# Altium PCB RatumnScanner_PcbDoc@20260329fix1.pcbdoc (part 1 of 2)
Units mil, origin at the board's own origin, x right, y up, seen from the top; angles counter-clockwise.
Board outline 3937.01 x 983.86 mil, 6 copper layers (Top Layer, 内层1, 内层2, CONNECTION, IO_PINS, Bottom Layer), stack 62.125 mil thick; 143 components, 128 nets, 581 pads, 301 vias.
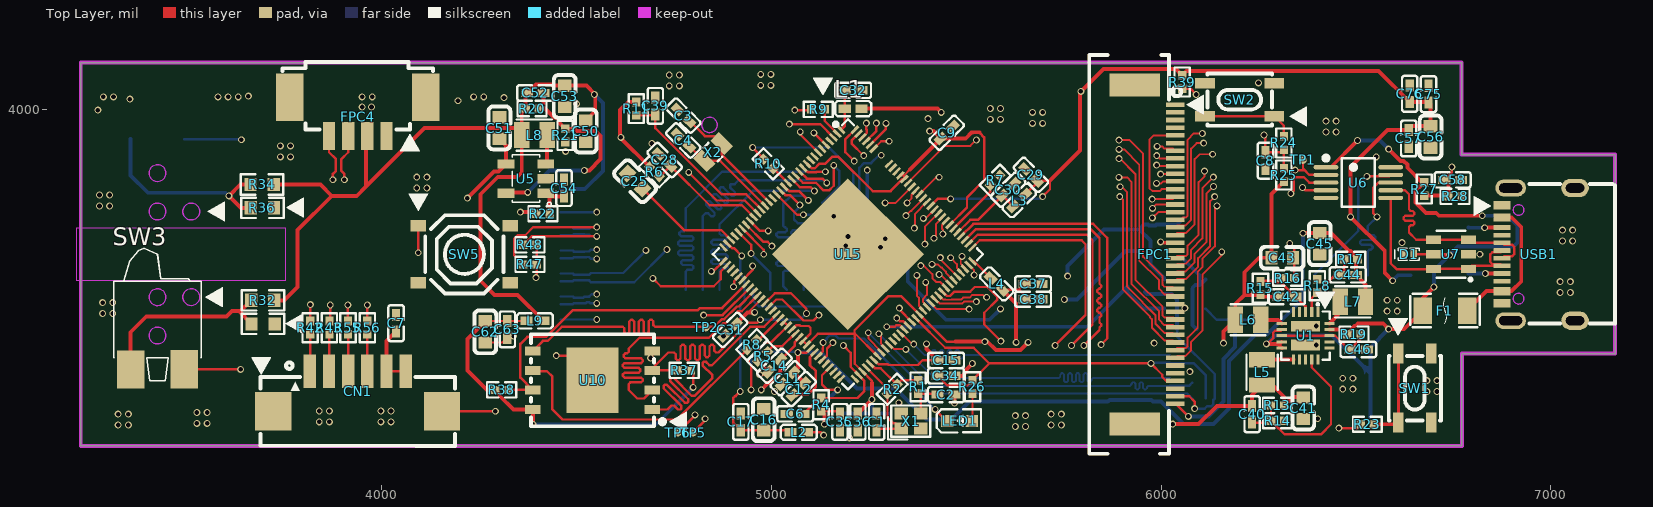
[diagram p0: Top Layer view]
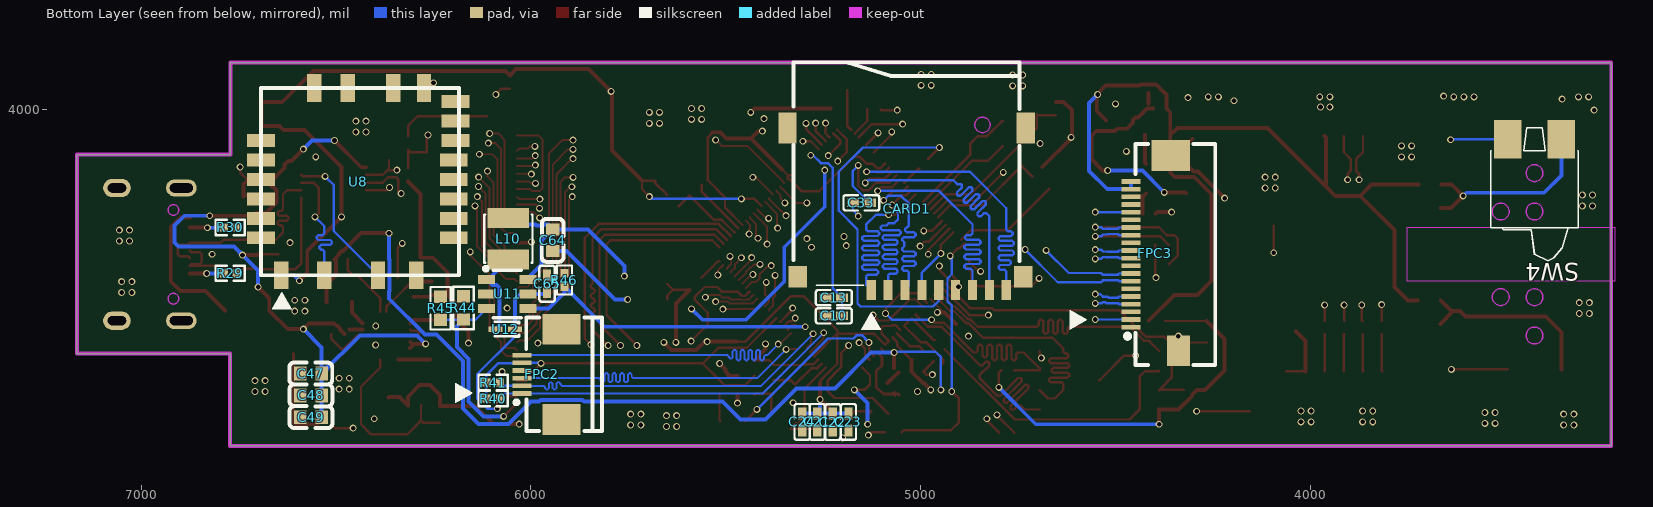
[diagram p1: Bottom Layer view, seen from below]
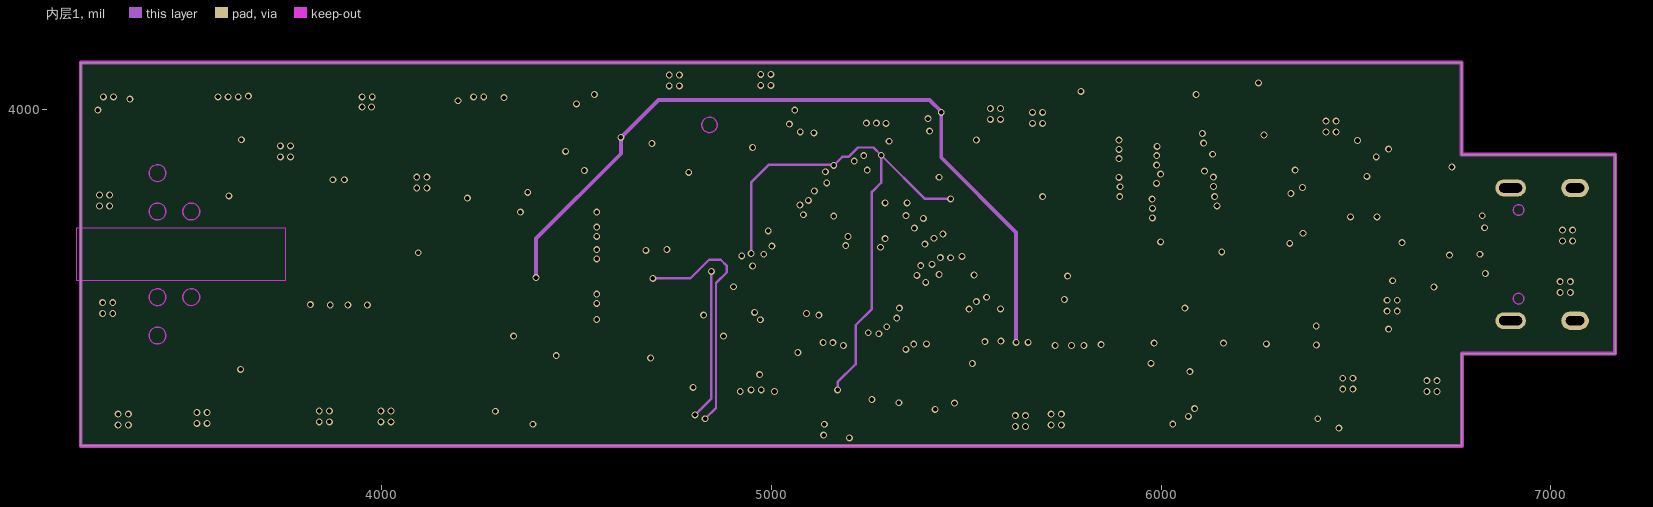
[diagram p2: 内层1]
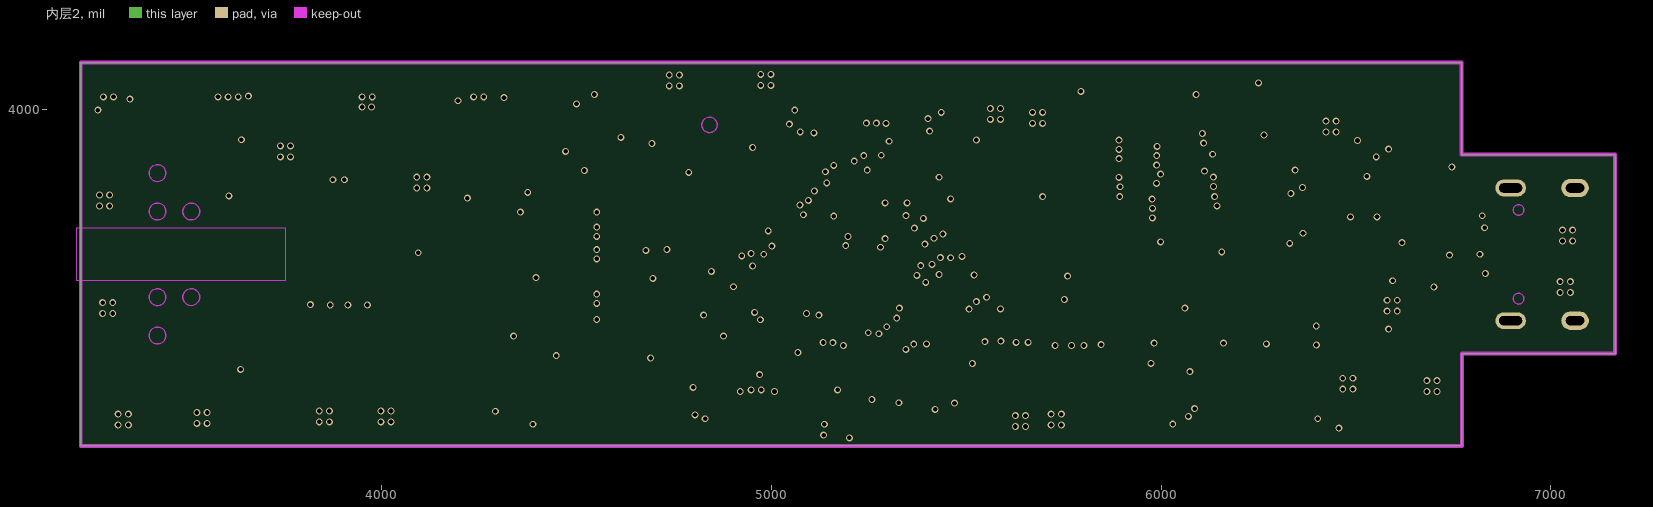
[diagram p3: 内层2]
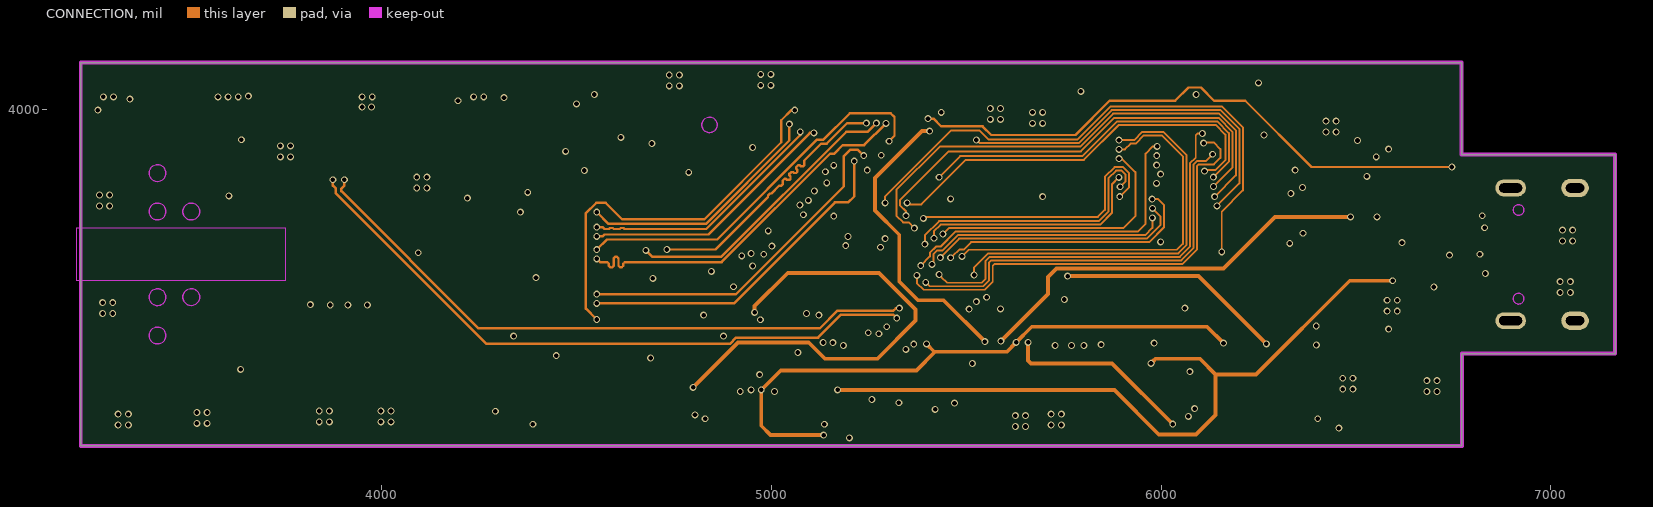
[diagram p4: CONNECTION]
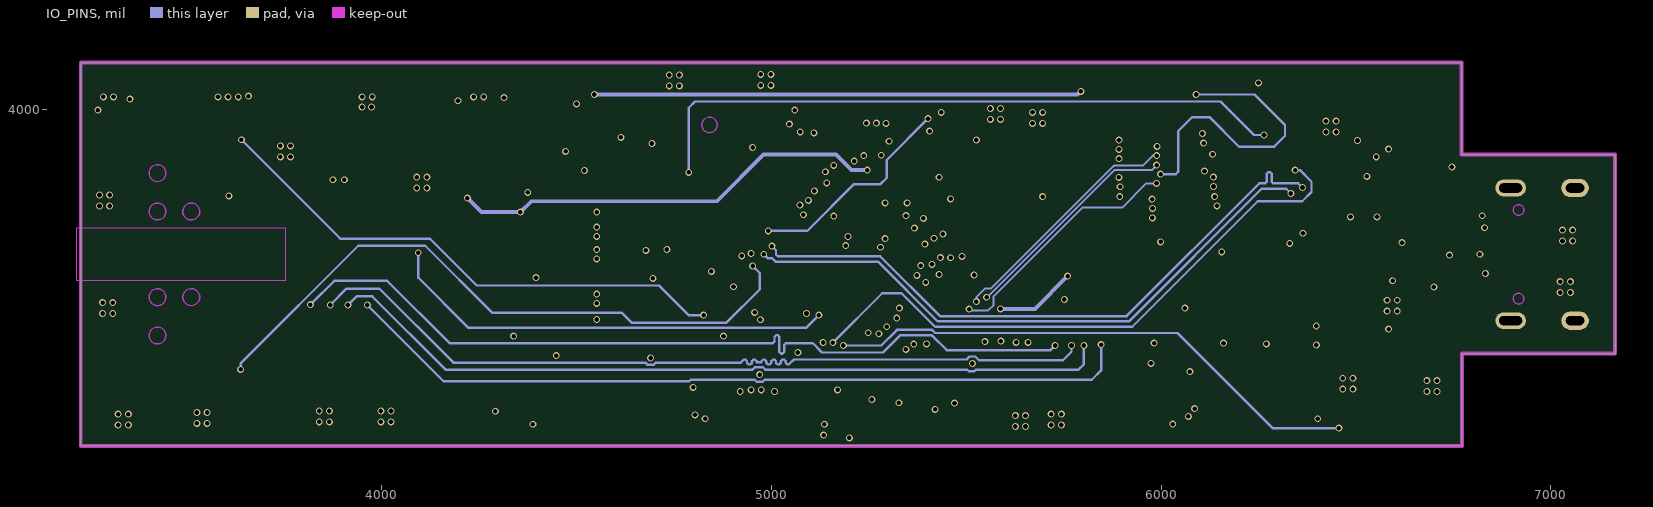
[diagram p5: IO_PINS]

## Layer stack, top to bottom
Top Layer: signal copper 1.378
Dielectric1: surface 3.913, 3313 RC57% 4.2mil, Dk 0
内层1: signal copper 1.378
Dielectric2: surface 21.654, 0.55mm H/H No copper, Dk 0
内层2: signal copper 1.378
Dielectric3: surface 4.283, 2116 RC54% 4.9mil, Dk 0
CONNECTION: signal copper 0.598
Dielectric4: surface 21.654, 0.55mm H/H No copper, Dk 0
IO_PINS: signal copper 0.598
Dielectric5: surface 3.913, 3313 RC57% 4.2mil, Dk 0
Bottom Layer: signal copper 1.378

## Board outline
7165.01,3883.86 7165.01,3373.23 6771.9,3373.23 6771.9,3136.14 3228,3136.14 3228,4120 6771.31,4120 6771.31,3883.86

## Design rules (kind name [scope] priority, off if disabled: settings)
BoardOutlineClearance copperThickness1oz [All] p0: genericclearance=10 ignorepadtopadclearanceinfootprint=FALSE except(0: Arc-SplitContinuation Track-SplitContinuation SMDPad-SplitContinuation THPad-SplitContinuation Via-SplitContinuation Fill-SplitContinuation Poly-SplitContinuation Region-SplitContinuation Text-SplitContinuation)
BoardOutlineClearance copperThickness2oz [All] p0: genericclearance=10 ignorepadtopadclearanceinfootprint=FALSE except(0: Arc-SplitContinuation Track-SplitContinuation SMDPad-SplitContinuation THPad-SplitContinuation Via-SplitContinuation Fill-SplitContinuation Poly-SplitContinuation Region-SplitContinuation Text-SplitContinuation)
BoardOutlineClearance 50R_安全间距 [All] p0: genericclearance=10 ignorepadtopadclearanceinfootprint=FALSE except(0: Arc-SplitContinuation Track-SplitContinuation SMDPad-SplitContinuation THPad-SplitContinuation Via-SplitContinuation Fill-SplitContinuation Poly-SplitContinuation Region-SplitContinuation Text-SplitContinuation)
BoardOutlineClearance Plane_innerPlane [All] p0: genericclearance=10 ignorepadtopadclearanceinfootprint=FALSE except(0: Arc-SplitContinuation Track-SplitContinuation SMDPad-SplitContinuation THPad-SplitContinuation Via-SplitContinuation Fill-SplitContinuation Poly-SplitContinuation Region-SplitContinuation Text-SplitContinuation)
BoardOutlineClearance Copper_copperRegion [All] p0: genericclearance=10 ignorepadtopadclearanceinfootprint=FALSE except(0: Arc-SplitContinuation Track-SplitContinuation SMDPad-SplitContinuation THPad-SplitContinuation Via-SplitContinuation Fill-SplitContinuation Poly-SplitContinuation Region-SplitContinuation Text-SplitContinuation)
BoardOutlineClearance otherClearance [All] p0: genericclearance=10 ignorepadtopadclearanceinfootprint=FALSE except(0: Arc-SplitContinuation Track-SplitContinuation SMDPad-SplitContinuation THPad-SplitContinuation Via-SplitContinuation Fill-SplitContinuation Poly-SplitContinuation Region-SplitContinuation Text-SplitContinuation)
Clearance copperThickness1oz [All] p1: gap=7 ignorepadtopadclearanceinfootprint=FALSE
Clearance copperThickness2oz [All] p1: gap=7 ignorepadtopadclearanceinfootprint=FALSE
Clearance 50R_安全间距 [All] p1: gap=7 ignorepadtopadclearanceinfootprint=FALSE
Clearance Plane_innerPlane [All] p1: gap=7 ignorepadtopadclearanceinfootprint=FALSE
Clearance Copper_copperRegion [All] p1: gap=7 ignorepadtopadclearanceinfootprint=FALSE
Clearance otherClearance [All] p1: gap=7 ignorepadtopadclearanceinfootprint=FALSE
DiffPairsRouting USB [All] p1: maxuncoupledlength=30 minlimit=7.4803 maxlimit=Infinity mostfreqgap=7.7953 toplayer_minwidth=6.1811 toplayer_prefwidth=6.1811 toplayer_maxwidth=6.1811 bottomlayer_minwidth=6.1811 bottomlayer_prefwidth=6.1811 bottomlayer_maxwidth=6.1811 midlayer1_minwidth=6.1811 midlayer1_prefwidth=6.1811 midlayer1_maxwidth=6.1811 midlayer2_minwidth=6.1811 midlayer2_prefwidth=6.1811 midlayer2_maxwidth=6.1811 midlayer3_minwidth=6.1811 midlayer3_prefwidth=6.1811 midlayer3_maxwidth=6.1811 midlayer4_minwidth=6.1811 midlayer4_prefwidth=6.1811 midlayer4_maxwidth=6.1811
DiffPairsRouting GMII/MIPI [All] p1: maxuncoupledlength=10 minlimit=7.9921 maxlimit=Infinity mostfreqgap=7.9921 toplayer_minwidth=4.8819 toplayer_prefwidth=4.8819 toplayer_maxwidth=4.8819 bottomlayer_minwidth=4.8819 bottomlayer_prefwidth=4.8819 bottomlayer_maxwidth=4.8819 midlayer1_minwidth=4.8819 midlayer1_prefwidth=4.8819 midlayer1_maxwidth=4.8819 midlayer2_minwidth=4.8819 midlayer2_prefwidth=4.8819 midlayer2_maxwidth=4.8819 midlayer3_minwidth=4.8819 midlayer3_prefwidth=4.8819 midlayer3_maxwidth=4.8819 midlayer4_minwidth=4.8819 midlayer4_prefwidth=4.8819 midlayer4_maxwidth=4.8819
DiffPairsRouting MIC [All] p1: maxuncoupledlength=27.5984 minlimit=7.9921 maxlimit=Infinity mostfreqgap=7.9921 toplayer_minwidth=4.0157 toplayer_prefwidth=4.0157 toplayer_maxwidth=4.0157 bottomlayer_minwidth=4.0157 bottomlayer_prefwidth=4.0157 bottomlayer_maxwidth=4.0157 midlayer1_minwidth=4.0157 midlayer1_prefwidth=4.0157 midlayer1_maxwidth=4.0157 midlayer2_minwidth=4.0157 midlayer2_prefwidth=4.0157 midlayer2_maxwidth=4.0157 midlayer3_minwidth=4.0157 midlayer3_prefwidth=4.0157 midlayer3_maxwidth=4.0157 midlayer4_minwidth=4.0157 midlayer4_prefwidth=4.0157 midlayer4_maxwidth=4.0157
PasteMaskExpansion pasteMaskExpansion [All] p1: expansion=0
PlaneConnect innerPlane [All] p1: planeconnectstyle=Relief reliefexpansion=20 reliefentries=4 reliefconductorwidth=10 reliefairgap=10
PolygonConnect copperRegion [All] p1: connectstyle=Direct reliefentries=4 reliefconductorwidth=10 polygonreliefangle="90 Angle" airgapwidth=10
RoutingVias viaSize [All] p1: viastyle="Through Hole" holewidth=11.811 minholewidth=11.811 maxholewidth=247.9922 width=11.811 minwidth=11.811 maxwidth=247.9922
SolderMaskExpansion solderMaskExpansion [All] p1: useseparateexpansions=TRUE expansion=2.0079 expansionbottom=2.0079
Width copperThickness1oz [All] p1: maxlimit=100 minlimit=5 preferedwidth=8
Width Sign50R [All] p1: maxlimit=6 minlimit=6 preferedwidth=6

## Components (designator, comment, footprint, x,y, rotation, side; value= is the part's Value field where it differs from the comment)
C1 "" C0402 5270,3198 r270 top
C2 "" C0402 5448,3268 r0 top
C3 "" C0402 4774,3984 r315 top
C4 "" C0402 4774,3920 r315 top
C6 "" C0402 5060.95,3218.4 r0 top
C7 "" C0402 4036.97,3451.18 r270 top
C8 "" C0402 6267.74,3868.2 r90 top
C9 "" C0402 5450,3940 r225 top
C10 "" C0402 5222.81,3470.06 r0 bottom
C11 "" C0402 5041.74,3309.75 r45 top
C12 "" C0402 5069.75,3282.26 r45 top
C13 "" C0402 5222.81,3516.71 r0 bottom
C14 "" C0402 5008,3342 r45 top
C15 "" C0402 5448.21,3356.01 r180 top
C16 "" C0603 4980.26,3203.39 r270 top
C17 "" C0402 4921.62,3197.92 r270 top
C21 "" C0402 5265.25,3198.02 r90 bottom
C22 "" C0402 5225.25,3197.43 r90 bottom
C23 "" C0402 5185.25,3197.73 r90 bottom
C24 "" C0402 5304,3198 r90 bottom
C25 "" C0603 4650,3816 r135 top
C28 "" C0402 4726,3870 r315 top
C29 "" C0402 5666,3832 r315 top
C30 "" C0402 5608,3794 r225 top
C31 "" C0402 4894,3434 r45 top
C32 "" C0402 5209.82,4048.76 r180 top
C33 "" C0402 5152,3760 r180 bottom
C34 "" C0402 5448,3316 r180 top
C35 "" C0402 5176,3198 r90 top
C36 "" C0402 5222,3198 r90 top
C37 "" C0402 5671.5,3551.77 r0 top
C38 "" C0402 5671.5,3512.82 r0 top
C39 "" C0402 4702.21,4008.77 r270 top
C40 "" C0402 6233.47,3217.6 r90 top
C41 "" C0603 6364.93,3233.06 r270 top
C42 "" C0402 6322.93,3519.06 r180 top
C43 "" C0603 6310.93,3619.06 r0 top
C44 "" C0402 6478.93,3575.06 r0 top
C45 "" C0603 6406.93,3655.06 r270 top
C46 "" C0402 6506.25,3383.78 r180 top
C47 "" C0603 6564.47,3322.09 r180 bottom
C48 "" C0603 6564,3266 r180 bottom
C49 "" C0603 6564,3210 r180 bottom
C50 "" C0603 4523.64,3943.83 r270 top
C51 "" C0603 4302,3952 r270 top
C52 "" C0402 4394,4042 r180 top
C53 "" C0603 4469.64,4033.21 r90 top
C54 "" C0402 4468,3798 r90 top
C56 "" C0603 6691.58,3929.25 r90 top
C57 "" C0402 6635.36,3925.24 r90 top
C58 "" C0402 6748.11,3818.82 r180 top
C62 "" C0603 4266.07,3429.29 r90 top
C63 "" C0402 4322.56,3435.27 r90 top
C64 "" C0603 5944,3664 r90 bottom
C65 "" C0402 5958.54,3552.54 r270 bottom
C75 "" C0402 6686.13,4038.89 r270 top
C76 "" C0402 6637.94,4039.79 r270 top
CARD1 "" TF-SMD_TF-01A 5036.18,3744.28 r0 bottom
CN1 "" CONN-SMD_6P-P1.25_HC-1.25-6PWT 3938.59,3276.49 r0 top
D1 "" DFN1006-2L-BI-1 6635.36,3628.07 r0 top
F1 "" F1206 6728.39,3483.5 r180 top
FPC1 "" FPC-SMD_P0.50-40P_LCS-SJ-H2.0 5983.91,3627.87 r90 top
FPC2 "" FPC-SMD_6P-P0.50_XUNPU_FPC-05F-6PH20 5972,3320 r90 bottom
FPC3 "" FPC-SMD_20P-P0.50_XUNPU_FPC-05F-20PH20 4409.1,3627.87 r90 bottom
FPC4 "" CONN-SMD_1.25-4PWB 3938.79,3981.46 r180 top
L1 "" L0402 5209.85,4001.71 r0 top
L2 "" L0402 5070.26,3171.39 r180 top
L3 "" L0402 5636,3766 r225 top
L4 "" L0402 5578,3552 r315 top
L5 "" IND-SMD_L2.0-W1.6 6258.93,3325.06 r270 top
L6 "" IND-SMD_L2.0-W1.6 6222.88,3459.84 r180 top
L7 "" IND-SMD_L2.0-W1.6 6492,3506 r0 top
L8 "" IND-SMD_L2.0-W1.6 4392,3934 r180 top
L9 "" L0402 4393.32,3457.4 r180 top
L10 "" IND-SMD_L3.0-W3.0_FNR30XXS 6058,3668 r90 bottom
LED1 "" LED_0603 5484.96,3200.64 r0 top
R1 "" R0402 5376.81,3287.7 r270 top
R2 "" R0402 5310,3282 r45 top
R4 "" R0402 5127.91,3242.31 r270 top
R5 "" R0402 4978,3366 r45 top
R6 "" R0402 4700,3840 r135 top
R7 "" R0402 5574,3818 r225 top
R8 "" R0402 4950,3396 r225 top
R9 "" R0402 5120,4000 r180 top
R10 "" R0402 4992,3860 r135 top
R11 "" R0402 4653.27,4001.85 r90 top
R13 "" R0402 6298.57,3240.14 r0 top
R14 "" R0402 6299.11,3201.09 r180 top
R15 "" R0402 6254.93,3541.06 r270 top
R16 "" R0402 6324.93,3567.06 r180 top
R17 "" R0402 6486.93,3615.06 r0 top
R18 "" R0402 6400.93,3547.06 r270 top
R19 "" R0402 6494.93,3423.06 r180 top
R20 "" R0402 4386,4002 r180 top
R21 "" R0402 4470.96,3932.96 r90 top
R22 "" R0402 4414,3732 r180 top
R23 "" R0402 6529.37,3191.88 r0 top
R24 "" R0402 6315.11,3913.67 r90 top
R25 "" R0402 6315.11,3831.34 r270 top
R26 "" R0402 5516,3288 r90 top
R27 "" R0402 6675.24,3795.46 r90 top
R28 "" R0402 6754.13,3776.65 r180 top
R29 "" R0402 6771.31,3579.36 r180 bottom
R30 "" R0402 6771.31,3696.77 r180 bottom
R32 "" R0603 3695.14,3509.91 r0 top
R34 "" R0603 3693.13,3807.15 r0 top
R36 "" R0603 3694.22,3747.22 r180 top
R37 "" R0402 4776.32,3330.2 r0 top
R38 "" R0402 4308.18,3280 r180 top
R39 "" R0402 6054,4070 r90 top
R40 "" R0402 6097.01,3257.9 r180 bottom
R41 "" R0402 6097.01,3298.84 r180 bottom
R42 "" R0402 3816.49,3439.87 r270 top
R43 "" R0402 3866,3439.87 r270 top
R44 "" R0603 6173.07,3490.24 r270 bottom
R45 "" R0603 6231.65,3489.4 r270 bottom
R46 "" R0402 5914,3562 r270 bottom
R47 "" R0402 4380.52,3601.97 r0 top
R48 "" R0402 4380.52,3652.17 r0 top
R55 "" R0402 3913.49,3439.87 r270 top
R56 "" R0402 3963.23,3439.87 r270 top
SW1 "" SW-SMD_4P-L4.2-W3.3-P2.15-LS5.1 6651.03,3284.52 r270 top
SW2 "" SW-SMD_4P-L4.2-W3.3-P2.15-LS5.1 6201.76,4024.81 r0 top
SW3 "" SW-SMD_ESE22MH24 3424.85,3332.6 r0 top
SW4 "" SW-SMD_ESE22MH24 3424.85,3923.15 r0 bottom
SW5 "" SW-SMD_4P-L5.1-W5.1-P3.70-LS6.5-TL_H1.5 4212.25,3627.87 r0 top
TP1 "" Test-Point-0.5mm 6364,3870 r0 top
TP2 "" Test-Point-0.5mm 4831.6,3440.27 r0 top
TP5 "" Test-Point-0.5mm 4798.99,3170.38 r270 top
TP6 "" Test-Point-0.5mm 4759.62,3170.38 r270 top
U1 "" QFN-20_L3.0-W3.0-P0.40-BL-EP1.9 6370.73,3419.12 r180 top
U5 "" SOT-23-5_L3.0-W1.7-P0.95-LS2.8-BR 4370,3822 r0 top
U6 "" MSOP-10_L3.0-W3.0-P0.50-LS5.0-BL 6506,3812 r270 top
U7 "" SOT-23-6_L2.9-W1.7-P0.95-LS2.8-BL 6743.79,3628.07 r90 top
U8 "" AIC8800DC 6438.49,3814.4 r270 bottom
U10 "" WSON-8_L8.0-W6.0-P1.27-TL-EP-1 4541.15,3304.8 r180 top
U11 "" SOT-23-6_L2.9-W1.6-P0.95-LS2.8-BR 6060.64,3526.11 r0 bottom
U12 "" SOD-523_L1.2-W0.8-LS1.6-RD 6066,3436 r0 bottom
U15 "" QFN-128_L12.3-W12.3-P0.35-TL-EP7.0-1 5196.5,3627.87 r315 top
USB1 "" USB-C-SMD_TYPE-C-6PIN-2MD-073 6968.67,3627.87 r90 top
X1 "" CRYSTAL-SMD_4P-L2.0-W1.6-BL-A 5358,3200 r0 top
X2 "" CRYSTAL-SMD_2P-L2.0-W1.2 4850,3890 r45 top
? "" R0603 3695.83,3449.37 r180 top

## Footprints (in the part's own frame and the unit in brackets; to place one, negate y for a bottom-side part, rotate by r counter-clockwise, add the part's x,y. Pads: shape width x height; smd on the part's side, far side on the other; paste and mask are expansions set on the pad)
AIC8800DC [mm]
  rect 1.8x0.94 smd: 1(-6.1,4.17) 2(-6.1,2.17) 3(-6.1,-0.81) 4(-6.1,-2.97) 11(6.1,-5.13) 12(6.1,-2.33) 13(6.1,1.17) 14(6.1,3.67)
  rect 0.84x1.8 smd: 5(-2.69,-6.45) 6(-1.42,-6.45) 7(-0.15,-6.45) 8(1.12,-6.45) 9(2.39,-6.45) 10(3.66,-6.45) 15(3.66,6.1) 16(2.39,6.1) 17(1.12,6.1) 18(-0.15,6.1) 19(-1.42,6.1) 20(-2.69,6.223) 21(-3.96,6.223) 22(-5.23,6.223)
  silkscreen extent -6.1,-6.45 6.1,6.45
C0402 [mm]
  rect 0.79x0.54 smd: 1(-0.545,0) 2(0.545,0)
  silkscreen extent -1.17,-0.5 1.17,0.5
C0603 [mm]
  rect 0.8x0.9 smd: 1(-0.7,0) 2(0.7,0)
  silkscreen extent -1.41,-0.71 1.39,0.72
CONN-SMD_1.25-4PWB [mm]
  rect 0.8x1.8 smd: 1(-1.875,1.266) 2(-0.625,1.266) 3(0.625,1.266) 4(1.875,1.266)
  rect 1.8x3.1 smd: 5(-4.425,-1.266) 6(4.425,-1.266)
  silkscreen extent -4.9,-3.55 4.9,0.85
CONN-SMD_6P-P1.25_HC-1.25-6PWT [mm]
  rect 0.8x2.2 smd: 1(-3.125,1.3) 2(-1.875,1.3) 3(-0.625,1.3) 4(0.625,1.3) 5(1.875,1.3) 6(3.125,1.3)
  rect 2.35x2.5 smd: 7(-5.505,-1.3) 8(5.505,-1.3)
  silkscreen extent -6.33,-3.56 6.35,1.88
CRYSTAL-SMD_2P-L2.0-W1.2 [mm]
  rect 0.8x1.3 smd: 1(-0.8,0) 2(0.8,0)
  silkscreen extent -0.22,-0.64 0.22,0.64
CRYSTAL-SMD_4P-L2.0-W1.6-BL-A [mm]
  rect 0.875x0.775 smd: 1(-0.638,-0.488) 2(0.638,-0.488) 3(0.638,0.488) 4(-0.638,0.488)
  silkscreen extent -1.49,-1.2 1.27,1.02
DFN1006-2L-BI-1 [mm]
  rect 0.4x0.6 smd: 1(-0.325,0) 2(0.325,0)
  silkscreen extent -0.9,-0.4 0.68,0.4
F1206 [mm]
  rect 1.19x1.728 smd: 1(-1.445,0) 2(1.445,0)
  silkscreen extent -2.27,-1.09 2.27,1.09
FPC-SMD_6P-P0.50_XUNPU_FPC-05F-6PH20 [mm]
  rect 0.3x1.25 smd: 1(-1.25,1.288) 2(-0.75,1.288) 3(-0.25,1.288) 4(0.25,1.288) 5(0.75,1.288) 6(1.25,1.288)
  rect 2x2.5 smd: 7(2.94,-1.288) 8(-2.94,-1.288)
  silkscreen extent -3.7,-3.91 3.7,1.78
FPC-SMD_20P-P0.50_XUNPU_FPC-05F-20PH20 [mm]
  rect 0.3x1.25 smd: 1(-4.75,1.288) 2(-4.25,1.288) 3(-3.75,1.288) 4(-3.25,1.288) 5(-2.75,1.288) 6(-2.25,1.288) 7(-1.75,1.288) 8(-1.25,1.288) 9(-0.75,1.288) 10(-0.25,1.288) 11(0.25,1.288) 12(0.75,1.288) 13(1.25,1.288) 14(1.75,1.288) 15(2.25,1.288) 16(2.75,1.288) 17(3.25,1.288) 18(3.75,1.288) 19(4.25,1.288) 20(4.75,1.288)
  rect 2x2.5 smd: 21(6.44,-1.287)
  rect 2x1.5 smd: 22(-6.287,-1.797)
  silkscreen extent -7.2,-4.19 7.2,1.67
FPC-SMD_P0.50-40P_LCS-SJ-H2.0 [mm]
  rect 0.3x1.2 smd: 1(9.751,-1.318) 2(9.252,-1.318) 3(8.753,-1.318) 4(8.252,-1.318) 5(7.752,-1.318) 6(7.252,-1.318) 7(6.751,-1.318) 8(6.251,-1.318) 9(5.753,-1.318) 10(5.253,-1.318) 11(4.752,-1.318) 12(4.252,-1.318) 13(3.752,-1.318) 14(3.251,-1.318) 15(2.752,-1.318) 16(2.253,-1.318) 17(1.753,-1.318) 18(1.252,-1.318) 19(0.752,-1.318) 20(0.251,-1.318) 21(-0.249,-1.318) 22(-0.748,-1.318) 23(-1.247,-1.318) 24(-1.748,-1.318) 25(-2.248,-1.318) 26(-2.748,-1.318) 27(-3.249,-1.318) 28(-3.749,-1.318) 29(-4.247,-1.318) 30(-4.747,-1.318) 31(-5.248,-1.318) 32(-5.748,-1.318) 33(-6.248,-1.318) 34(-6.749,-1.318) 35(-7.248,-1.318) 36(-7.747,-1.318) 37(-8.247,-1.318) 38(-8.748,-1.318) 39(-9.248,-1.318) 40(-9.749,-1.318)
  rect 1.5x3.3 smd: 41(11.044,1.318) 42(-11.044,1.318)
  silkscreen extent -13,-1.73 13,4.28
IND-SMD_L2.0-W1.6 [mm]
  rect 1x1.72 smd: 1(0.828,0) 2(-0.828,0)
  silkscreen extent -1.14,-1.02 1.14,1.02
IND-SMD_L3.0-W3.0_FNR30XXS [mm]
  rect 1.3x2.72 smd: 1(1.35,0) 2(-1.35,0)
  silkscreen extent -1.58,-1.58 1.58,1.58
L0402 [mm]
  rect 0.79x0.54 smd: 1(-0.545,0) 2(0.545,0)
  silkscreen extent -1.17,-0.5 1.17,0.5
LED_0603 [mil]
  rect 31.5x31.5 smd: 1(-33.5,-0.4) 2(29.5,-0.2)
  silkscreen extent -61,-30 53,30
MSOP-10_L3.0-W3.0-P0.50-LS5.0-BL [mm]
  oval 0.28x1.62 smd: 1(-1,-2.11) 2(-0.5,-2.11) 3(0,-2.11) 4(0.5,-2.11) 5(1,-2.11) 6(1,2.11) 7(0.5,2.11) 8(0,2.11) 9(-0.5,2.11) 10(-1,2.11)
  silkscreen extent -1.74,-2.26 1.58,1.07
QFN-20_L3.0-W3.0-P0.40-BL-EP1.9 [mm]
  rect 0.2x0.665 smd: 1(-0.8,-1.55) 2(-0.4,-1.55) 3(0,-1.55) 4(0.4,-1.55) 5(0.8,-1.55) 11(0.8,1.55) 12(0.4,1.55) 13(0,1.55) 14(-0.4,1.55) 15(-0.8,1.55)
  rect 0.665x0.2 smd: 6(1.55,-0.8) 7(1.55,-0.4) 8(1.55,0) 9(1.55,0.4) 10(1.55,0.8) 16(-1.55,0.8) 17(-1.55,0.4) 18(-1.55,0) 19(-1.55,-0.4) 20(-1.55,-0.8)
  rect 1.9x0.699 smd: 21(0,0.61) 21(0,-0.61)
  silkscreen extent -1.58,-2.11 1.58,1.58
QFN-128_L12.3-W12.3-P0.35-TL-EP7.0-1 [mm]
  rect 0.665x0.196 smd: 1(-6.057,5.425) 2(-6.057,5.075) 3(-6.057,4.725) 4(-6.057,4.375) 5(-6.057,4.025) 6(-6.057,3.675) 7(-6.057,3.325) 8(-6.057,2.975) 9(-6.057,2.625) 10(-6.057,2.275) 11(-6.057,1.925) 12(-6.057,1.575) 13(-6.057,1.225) 14(-6.057,0.875) 15(-6.057,0.525) 16(-6.057,0.175) 17(-6.057,-0.175) 18(-6.057,-0.525) 19(-6.057,-0.875) 20(-6.057,-1.225) 21(-6.057,-1.575) 22(-6.057,-1.925) 23(-6.057,-2.275) 24(-6.057,-2.625) 25(-6.057,-2.975) 26(-6.057,-3.325) 27(-6.057,-3.675) 28(-6.057,-4.025) 29(-6.057,-4.375) 30(-6.057,-4.725) 31(-6.057,-5.075) 32(-6.057,-5.425) 65(6.058,-5.425) 66(6.058,-5.075) 67(6.058,-4.725) 68(6.058,-4.375) 69(6.058,-4.025) 70(6.058,-3.675) 71(6.058,-3.325) 72(6.058,-2.975) 73(6.058,-2.625) 74(6.058,-2.275) 75(6.058,-1.925) 76(6.058,-1.575) 77(6.058,-1.225) 78(6.058,-0.875) 79(6.058,-0.525) 80(6.058,-0.175) 81(6.058,0.175) 82(6.058,0.525) 83(6.058,0.875) 84(6.058,1.225) 85(6.058,1.575) 86(6.058,1.925) 87(6.058,2.275) 88(6.058,2.625) 89(6.058,2.975) 90(6.058,3.325) 91(6.058,3.675) 92(6.058,4.025) 93(6.058,4.375) 94(6.058,4.725) 95(6.058,5.075) 96(6.058,5.425)
  rect 0.196x0.665 smd: 33(-5.425,-6.057) 34(-5.075,-6.057) 35(-4.725,-6.057) 36(-4.375,-6.057) 37(-4.025,-6.057) 38(-3.675,-6.057) 39(-3.325,-6.057) 40(-2.975,-6.057) 41(-2.625,-6.057) 42(-2.275,-6.057) 43(-1.925,-6.057) 44(-1.575,-6.057) 45(-1.225,-6.057) 46(-0.875,-6.057) 47(-0.525,-6.057) 48(-0.175,-6.057) 49(0.175,-6.057) 50(0.525,-6.057) 51(0.875,-6.057) 52(1.225,-6.057) 53(1.575,-6.057) 54(1.925,-6.057) 55(2.275,-6.057) 56(2.625,-6.057) 57(2.975,-6.057) 58(3.325,-6.057) 59(3.675,-6.057) 60(4.025,-6.057) 61(4.375,-6.057) 62(4.725,-6.057) 63(5.075,-6.057) 64(5.425,-6.057) 97(5.425,6.057) 98(5.075,6.057) 99(4.725,6.057) 100(4.375,6.057) 101(4.025,6.057) 102(3.675,6.057) 103(3.325,6.057) 104(2.975,6.057) 105(2.625,6.057) 106(2.275,6.057) 107(1.925,6.057) 108(1.575,6.057) 109(1.225,6.057) 110(0.875,6.057) 111(0.525,6.057) 112(0.175,6.057) 113(-0.175,6.057) 114(-0.525,6.057) 115(-0.875,6.057) 116(-1.225,6.057) 117(-1.575,6.057) 118(-1.925,6.057) 119(-2.275,6.057) 123(-3.675,6.057) 124(-4.025,6.057) 125(-4.375,6.057) 126(-4.725,6.057) 127(-5.075,6.057) 128(-5.425,6.057)
  rect 7x7 smd: 129(0,0)
  silkscreen extent -6.68,-6.23 6.23,6.23
R0402 [mm]
  rect 0.566x0.54 smd: 1(-0.433,0) 2(0.433,0)
  silkscreen extent -0.94,-0.5 0.94,0.5
R0603 [mil]
  rect 31.75x34.02 smd: 1(-29.66,0) 2(29.66,0)
  silkscreen extent -55,-26 55,26
SOD-523_L1.2-W0.8-LS1.6-RD [mm]
  rect 0.93x0.36 smd: 1(-0.635,0) 2(0.635,0)
  silkscreen extent -0.91,-0.55 0.68,0.55
SOT-23-5_L3.0-W1.7-P0.95-LS2.8-BR [mm]
  rect 1.1x0.6 smd: 1(1.3,-0.95) 2(1.3,0) 3(1.3,0.95) 4(-1.3,0.95) 5(-1.3,-0.95)
  silkscreen extent -0.9,-1.78 1.65,1.55
SOT-23-6_L2.9-W1.6-P0.95-LS2.8-BR [mm]
  rect 1.1x0.6 smd: 1(1.35,-0.95) 2(1.35,0) 3(1.35,0.95) 4(-1.35,0.95) 5(-1.35,0) 6(-1.35,-0.95)
  silkscreen extent -0.9,-1.78 1.52,1.55
SOT-23-6_L2.9-W1.7-P0.95-LS2.8-BL [mm]
  rect 0.532x0.99 smd: 1(-0.95,-1.145) 2(0,-1.145) 3(0.95,-1.145) 4(0.95,1.145) 5(0,1.145) 6(-0.95,1.145)
  silkscreen extent -1.75,-1.37 1.53,0.93
SW-SMD_4P-L4.2-W3.3-P2.15-LS5.1 [mm]
  rect 1.3x0.7 smd: 1(-2.25,1.075) 2(2.25,1.075) 3(-2.25,-1.075) 4(2.25,-1.075)
  silkscreen extent -2.1,-1.7 2.1,1.7
SW-SMD_4P-L5.1-W5.1-P3.70-LS6.5-TL_H1.5 [mm]
  rect 1x0.75 smd: 1(-3,1.85) 2(3,1.85) 3(-3,-1.85) 4(3,-1.85)
  silkscreen extent -2.55,-2.55 2.55,2.55
SW-SMD_ESE22MH24 [mm]
  rect 1.8x2.5 smd: 1(-1.75,-0.005) 2(1.75,0.005)
  Board Outline Layer circle w0.003: c0,2.207 r0.55
  Board Outline Layer circle w0.003: c0,4.707 r0.55
  Board Outline Layer circle w0.003: c2.2,4.712 r0.55
  Board Outline Layer region: 0.55,2.207 0.496,1.968 0.343,1.777 0.122,1.671 -0.122,1.671 -0.343,1.777 -0.496,1.968 -0.55,2.207 -0.55,2.207 -0.496,2.445 -0.343,2.637 -0.122,2.743 0.122,2.743 0.343,2.637 0.496,2.445 0.55,2.207
  Board Outline Layer region: 0.55,2.207 0.496,1.968 0.343,1.777 0.122,1.671 -0.122,1.671 -0.343,1.777 -0.496,1.968 -0.55,2.207 -0.55,2.207 -0.496,2.445 -0.343,2.637 -0.122,2.743 0.122,2.743 0.343,2.637 0.496,2.445 0.55,2.207
  Board Outline Layer region: 0.55,4.707 0.496,4.468 0.343,4.277 0.122,4.171 -0.122,4.171 -0.343,4.277 -0.496,4.468 -0.55,4.707 -0.55,4.707 -0.496,4.946 -0.343,5.137 -0.122,5.243 0.122,5.243 0.343,5.137 0.496,4.946 0.55,4.707
  Board Outline Layer region: 0.55,4.707 0.496,4.468 0.343,4.277 0.122,4.171 -0.122,4.171 -0.343,4.277 -0.496,4.468 -0.55,4.707 -0.55,4.707 -0.496,4.946 -0.343,5.137 -0.122,5.243 0.122,5.243 0.343,5.137 0.496,4.946 0.55,4.707
  Board Outline Layer region: 2.75,4.712 2.695,4.473 2.543,4.282 2.322,4.176 2.077,4.176 1.857,4.282 1.704,4.473 1.65,4.712 1.65,4.712 1.704,4.951 1.857,5.142 2.077,5.248 2.322,5.248 2.543,5.142 2.695,4.951 2.75,4.712
  Board Outline Layer region: 2.75,4.712 2.695,4.473 2.543,4.282 2.322,4.176 2.077,4.176 1.857,4.282 1.704,4.473 1.65,4.712 1.65,4.712 1.704,4.951 1.857,5.142 2.077,5.248 2.322,5.248 2.543,5.142 2.695,4.951 2.75,4.712
  silkscreen extent -2.85,-0.74 2.85,7.91
Test-Point-0.5mm [mm]
  round 0.5 smd: 1(0,0)
TF-SMD_TF-01A [mm]
  rect 0.6x1.3 smd: 1(2.301,5.276) 2(1.201,5.276) 3(0.101,5.276) 4(-0.999,5.276) 5(-2.099,5.276) 6(-3.199,5.276) 7(-4.299,5.276) 8(-5.399,5.276) 9(-6.499,5.276)
  rect 1.2x1.4 smd: 10(-7.599,4.426) 13(7.081,4.426)
  rect 1.2x2 smd: 11(-7.76,-5.276) 12(7.76,-5.276)
  Board Outline Layer circle w0.003: c-4.95,-5.478 r0.5
  Board Outline Layer region: -4.45,-5.478 -4.5,-5.261 -4.638,-5.087 -4.839,-4.991 -5.061,-4.991 -5.262,-5.087 -5.4,-5.261 -5.45,-5.478 -5.45,-5.478 -5.4,-5.695 -5.262,-5.869 -5.061,-5.965 -4.839,-5.965 -4.638,-5.869 -4.5,-5.695 -4.45,-5.478
  Board Outline Layer region: -4.45,-5.478 -4.5,-5.261 -4.638,-5.087 -4.839,-4.991 -5.061,-4.991 -5.262,-5.087 -5.4,-5.261 -5.45,-5.478 -5.45,-5.478 -5.4,-5.695 -5.262,-5.869 -5.061,-5.965 -4.839,-5.965 -4.638,-5.869 -4.5,-5.695 -4.45,-5.478
  silkscreen extent -7.37,-9.56 7.37,4.97
USB-C-SMD_TYPE-C-6PIN-2MD-073 [mm]
  rect 0.55x1.1 smd: 1(-3.2,2.375) 2(-2.4,2.375) 11(2.4,2.375) 12(3.2,2.375)
  rect 0.3x1.1 smd: 3(-1.75,2.375) 4(-1.25,2.375) 5(-0.75,2.375) 6(-0.25,2.375) 7(0.25,2.375) 8(0.75,2.375) 9(1.25,2.375) 10(1.75,2.375)
  oval 1.2x1.8 hole 0.6 slot 1.2 at 90 deg: 13(-4.325,-2.375) 14(4.325,-2.375)
  oval 1.1x2 hole 0.6 slot 1.5 at 90 deg: 13(-4.325,1.825) 14(4.325,1.825)
  Board Outline Layer circle w0.003: c-2.89,1.305 r0.35
  Board Outline Layer circle w0.003: c2.89,1.305 r0.35
  Board Outline Layer region: -2.89,0.955 -3.042,0.99 -3.164,1.087 -3.231,1.227 -3.231,1.383 -3.164,1.523 -3.042,1.62 -2.89,1.655 -2.89,1.655 -2.738,1.62 -2.616,1.523 -2.549,1.383 -2.549,1.227 -2.616,1.087 -2.738,0.99 -2.89,0.955
  Board Outline Layer region: -2.89,0.955 -3.042,0.99 -3.164,1.087 -3.231,1.227 -3.231,1.383 -3.164,1.523 -3.042,1.62 -2.89,1.655 -2.89,1.655 -2.738,1.62 -2.616,1.523 -2.549,1.383 -2.549,1.227 -2.616,1.087 -2.738,0.99 -2.89,0.955
  Board Outline Layer region: 2.89,0.955 2.738,0.99 2.616,1.087 2.549,1.227 2.549,1.383 2.616,1.523 2.738,1.62 2.89,1.655 2.89,1.655 3.042,1.62 3.164,1.523 3.231,1.383 3.231,1.227 3.164,1.087 3.042,0.99 2.89,0.955
  Board Outline Layer region: 2.89,0.955 2.738,0.99 2.616,1.087 2.549,1.227 2.549,1.383 2.616,1.523 2.738,1.62 2.89,1.655 2.89,1.655 3.042,1.62 3.164,1.523 3.231,1.383 3.231,1.227 3.164,1.087 3.042,0.99 2.89,0.955
  silkscreen extent -4.5,-4.97 4.57,0.6
WSON-8_L8.0-W6.0-P1.27-TL-EP-1 [mm]
  rect 1x0.6 smd: 1(-3.9,1.905) 2(-3.9,0.635) 3(-3.9,-0.635) 4(-3.9,-1.905) 5(3.9,-1.905) 6(3.9,-0.635) 7(3.9,0.635) 8(3.9,1.905)
  rect 3.4x4.3 smd: 9(0,0)
  silkscreen extent -4.7,-3 4,3

## Via types
v1: diameter 17.72, hole 11.81, Top Layer to Bottom Layer, 301 vias

## Nets (pads, with @x,y where several pads share a name; then routed paths per layer and width w, separated by ;. In a path a pad name is that pad's centre, name@x,y a point inside that pad or via, vN(x,y) a via of type N, cw(c..) or ccw(c..) an arc to the next point about the centre after c; other vN are vias at no path point)
$1N2117: C2.1 R1.2 X1.3 | length 104.9
  Top Layer w6.2: X1.3@5383.12,3219.21 5383.12,3264.35 R1.2@5376.81,3270.66 5423.88,3270.66 C2.1@5426.54,3268
$1N2122: R1.1 R2.2 U15.69 | length 150.2
  Top Layer w6.2: U15.69@5253.09,3347.19 5254.27,3347.19 5265.6,3335.87 5270.63,3335.87 5271.1,3335.39 5280.71,3335.39 R2.2@5322.05,3294.05 5332.74,3304.74 R1.1@5376.81,3304.74
$1N2138: C1.2 R2.1 U15.68 X1.1 | length 262.4
  Top Layer w6.2: U15.68@5243.35,3337.45 5297.95,3282.84 R2.1@5297.95,3269.95 5297.95,3208.81 5311.89,3194.87 5318.8,3194.87 X1.1@5332.88,3180.79 5274.25,3180.79 C1.2@5270,3176.54
$1N2391: C3.2 U15.20 X2.2 | length 306.7
  Top Layer w6.2: C3.2@4789.17,3968.83 4791.74,3968.83 4829.38,3931.18 4853.21,3931.18 ; 4853.28,3931.25 X2.2@4872.27,3912.27 4872.27,3883.9 U15.20@4993.77,3762.4
$1N2395: C4.2 U15.21 X2.1 | length 257.9
  Top Layer w6.2: C4.2@4789.17,3904.83 4790.63,3904.83 X2.1@4827.73,3867.73 4868.95,3867.73 U15.21@4984.03,3752.65
$1N4026: R5.2 U15.52 | length 91.4
  Top Layer w6.2: R5.2@4990.05,3378.05 5004.31,3392.31 5027.97,3392.31 5060.8,3425.14 U15.52@5061.98,3425.14
$1N4187: C25.1 U15.30 | length 281.3
  Top Layer w6.2: C25.1@4669.49,3796.51 4776,3690 4871.31,3690 U15.30@4896.34,3664.97
$1N4454: C28.2 R6.1 U15.24 | length 308.3
  Top Layer w6.2: R6.1@4712.05,3827.95 4714.3,3827.95 C28.2@4741.17,3854.83 4842,3754 4924.22,3754 U15.24@4954.8,3723.42
$1N4706: C30.2 L3.2 U15.101 | length 194.3
  Top Layer w6.2: U15.101@5477.19,3684.45 5478.37,3684.45 5510.13,3716.22 5530.22,3716.22 C30.2@5592.83,3778.83 L3.2@5620.83,3750.83
$1N4863: R7.2 U15.102 | length 150.9
  Top Layer w6.2: U15.102@5467.44,3694.2 5561.95,3788.71 R7.2@5561.95,3805.95
$1N6032: R8.1 U15.48 | length 84.2
  Top Layer w6.2: R8.1@4962.05,3408.05 4966.94,3408.05 U15.48@5023,3464.11
$1N7258: C32.2 L1.1 U15.1 | length 105.1
  Top Layer w7: U15.1@5178.94,3947.57 5188.36,3956.98 L1.1@5188.39,4001.71 C32.2@5188.36,4048.76
$1N7639: R10.1 U15.15 | length 53.7
  Top Layer w6.18: R10.1@5004.05,3847.95 5005.66,3847.95 U15.15@5042.49,3811.12
$1N8202: L4.1 U15.96 | length 64.5
  Top Layer w6.2: U15.96@5516.16,3610.26 5519.74,3610.26 L4.1@5562.83,3567.17
$1N11415: TP5.1 U15.34 | length 913.3
  Top Layer w6.2: v1(4696,3566) 4716,3546 4852,3546 4870,3564 4870,3583.92 U15.34@4886.6,3600.52 ; TP5.1@4798.99,3170.38 4830,3201.39 v1(4830,3206)
  内层1 w6.2: v1(4696,3566) 4792,3566 4840,3614 4870,3614 4886,3598 4886,3582 4858,3554 4858,3234 v1(4830,3206)
$1N11416: TP6.1 U15.33 | length 491.1
  Top Layer w6.2: TP6.1@4759.62,3170.38 4804,3214.76 v1(4804,3216) ; v1(4846,3584) 4850.59,3584 U15.33@4876.85,3610.26
  内层1 w6.2: v1(4804,3216) 4846,3258 v1(4846,3584)
$2N1488: C40.1 R13.1 R14.2 U1.14 | length 456.1
  Top Layer w6.18: C40.1@6233.47,3196.14 6277.12,3196.14 R14.2@6282.07,3201.09 6282.07,3239.61 R13.1@6281.53,3240.14
  Top Layer w6.2: R14.2@6282.07,3201.09 6295.93,3187.23 6295.93,3186.7 6301.25,3181.38 6301.78,3181.38 6317.16,3166 6410,3166 6436,3192 6436,3288 6386.48,3337.52 U1.14@6386.48,3358.09
$2N1577: L5.2 U1.11 | length 80.5
  Top Layer w10: L5.2@6258.93,3357.66 6338.8,3357.66 U1.11@6339.23,3358.09
$2N2468: C42.1 R15.1 R16.2 U1.3 | length 170.5
  Top Layer w6.18: R16.2@6307.89,3567.06 6307.89,3555.56 C42.1@6344.39,3519.06 6361.14,3502.31 6362.68,3502.31 6370.73,3494.25 U1.3@6370.73,3480.14
  Top Layer w10: R15.1@6254.93,3558.1 6298.93,3558.1 R16.2@6307.89,3567.06
$2N2471: L6.2 U1.6 | length 58
  Top Layer w10: L6.2@6255.48,3459.84 6300.47,3459.84 U1.6@6309.7,3450.61
$2N2629: C44.1 R17.1 R18.2 U1.2 | length 176.5
  Top Layer w6.18: U1.2@6386.48,3480.14 6386.48,3515.58 R18.2@6400.93,3530.02 6414.8,3543.89 6415.32,3543.89 6420.63,3549.21 6420.63,3549.73 6445.97,3575.06 C44.1@6457.47,3575.06 6469.89,3587.48 R17.1@6469.89,3615.06
$2N2632: L7.2 U1.20 | length 66.8
  Top Layer w10: U1.20@6431.75,3450.61 6459.4,3478.26 L7.2@6459.4,3506
$2N3621: C46.2 R19.1 U1.8 U1.18 | length 240.3
  Top Layer w6.18: U1.18@6431.75,3419.11 6446.89,3419.11 6482.22,3383.78 C46.2@6484.79,3383.78 6511.97,3410.96 R19.1@6511.97,3423.06
  Top Layer w6.2: U1.8@6309.7,3419.11 U1.18@6431.75,3419.11
$2N4217: C52.1 R20.1 R21.2 U5.5 | length 558.9
  Top Layer w10: U5.5@4318.81,3784.6 4321.22,3787 v1(4375,3787) ; R20.1@4403.04,4002 4418.96,4002 4442.12,3978.84 4448.83,3978.84 4455.27,3972.41 4455.27,3965.69 R21.2@4470.96,3950 4496.03,3950 4501.37,3944.66 4549.34,3944.66 4562,3932 4562,3872 4533,3843 v1(4520,3843) ; 4415.46,4014.42 C52.1@4415.46,4042
  Bottom Layer w10: v1(4375,3787) 4431,3843 v1(4520,3843)
$2N4283: L8.2 U5.3 | length 76
  Top Layer w10: U5.3@4421.19,3859.4 4424.6,3862.82 L8.2@4424.6,3934
$2N4539: C54.1 R22.1 U5.1 | length 95.4
  Top Layer w10: U5.1@4421.19,3784.6 U5.1@4429.24,3776.54 ; R22.1@4431.04,3732 4431.04,3774.74 U5.1@4429.24,3776.54 ; C54.1@4468,3776.54 U5.1@4429.24,3776.54
$5N3312: R30.1 USB1.10 | length 87.5
  Top Layer w10: v1(6830,3696) 6830.78,3696.78 USB1.10@6875.16,3696.78
  Bottom Layer w10: R30.1@6788.35,3696.77 6789.12,3696 v1(6830,3696)
$5N3316: R29.1 USB1.4 | length 87.1
  Top Layer w10: v1(6832,3578.67) USB1.4@6875.16,3578.67
  Bottom Layer w10: R29.1@6788.35,3579.36 6789.04,3578.67 v1(6832,3578.67)
$6N764: C7.2 CN1.5 CN1.6 | length 161.4
  Top Layer w6.2: CN1.5@4012.4,3327.67 CN1.6@4061.62,3327.67
  Top Layer w10: CN1.5@4012.4,3327.67 4012.4,3405.15 C7.2@4036.97,3429.72
$6N778: R24.2 SW2.3 SW2.4 | length 239.2
  Top Layer w6.18: SW2.3@6113.18,3982.49 SW2.4@6290.34,3982.49 6315.11,3957.72 R24.2@6315.11,3930.71
$6N781: R23.2 SW1.3 SW1.4 | length 241.1
  Top Layer w8: R23.2@6546.41,3191.88 6604.64,3191.88 SW1.4@6608.7,3195.94 SW1.3@6608.7,3373.11
$6N783: LED1.2 R26.1 | length 71.2
  Top Layer w6.2: LED1.2@5514.46,3200.44 5516,3201.98 R26.1@5516,3270.96
$6N797: ?.2 R32.1 SW3.1 | length 485.2
  Top Layer w10: SW3.1@3355.95,3332.4 3355.95,3427.95 3396,3468 3602,3468 3616,3482 3633.54,3482 ; R32.1@3665.48,3509.91 3637.57,3482 3633.54,3482 ; ?.2@3666.17,3449.37 3633.54,3482
$6N798: R34.1 R36.2 SW4.1 | length 503.8
  Top Layer w10: R34.1@3663.47,3807.15 3637.15,3807.15 v1(3608,3778) 3638.78,3747.22 R36.2@3664.56,3747.22
  Bottom Layer w10: SW4.1@3355.95,3923.35 3355.95,3830.05 3400,3786 3600,3786 v1(3608,3778)
$8N1098: FPC1.10 R39.1 | length 852
  Top Layer w5: v1(5998.65,3833.67) 6012.96,3833.67 6013.97,3834.67 FPC1.10@6035.79,3834.67
  Top Layer w6.2: R39.1@6054,4052.96 6075.04,4052.96 v1(6090,4038)
  IO_PINS w6.2: v1(5998.65,3833.67) 6037.67,3833.67 6044,3840 6044,3944 6080,3980 6124,3980 6200,3904 6290,3904 6318,3932 6318,3960 6240,4038 v1(6090,4038)
$8N1891: L10.2 U11.1 U12.2 | length 235
  Bottom Layer w10: L10.2@6058,3614.85 6099.18,3573.67 6099.18,3548.91 ; U12.2@6091,3436 6081,3446 6081,3538.91 6081.15,3539.06 6081.15,3542.47 6087.58,3548.91 6099.18,3548.91 ; U11.1@6113.79,3563.51 6099.18,3548.91
ADC: C39.2 R11.1 U15.22 | length 444.1
  Top Layer w6.2: R11.1@4653.27,3984.81 4699.71,3984.81 C39.2@4702.21,3987.31 4702.21,3951.79 4872,3782 4935.19,3782 U15.22@4974.28,3742.91
CODEC_LINEOUT: U15.29
ETH_LED0: U15.117
ETH_LED1: U15.118
ETH_RXN: R42.1 U15.97 | length 2767.5
  Top Layer w6.2: R42.1@3816.49,3456.91 3816.49,3497.92 v1(3817.29,3498.71) ; U15.97@5516.16,3645.48 5534.68,3664 5796,3664 5806.11,3653.89 5806.11,3472.11 v1(5728,3394)
  IO_PINS w6.2: v1(3817.29,3498.71) 3878.58,3560 4014,3560 4174,3400 5003.67,3400 5008.05,3404.38 5008.05,3416.45 5012.44,3420.83 5016.07,3420.83 5020.45,3416.45 5020.45,3377.48 5024.84,3373.1 5028.47,3373.1 5032.85,3377.48 5032.85,3395.62 5037.24,3400 5106,3400 5130,3376 5286,3376 5330,3420 5412,3420 5450,3382 5716,3382 v1(5728,3394)
ETH_RXP: R43.1 U15.98 | length 2773.9
  Top Layer w6.2: R43.1@3866,3456.91 3868,3458.92 v1(3868,3498) ; U15.98@5506.42,3655.22 5529.2,3678 5810,3678 5824.06,3663.94 5824.06,3448.06 v1(5770,3394)
  IO_PINS w6.2: v1(3868,3498) 3910,3540 3994,3540 4184,3350 4676.63,3350 4682.57,3344.06 4697.43,3344.06 4703.37,3350 4921.54,3350 4929.54,3358 4933.17,3358 4937.56,3353.62 4937.56,3349.48 4941.94,3345.1 4945.57,3345.1 4949.96,3349.48 4949.96,3353.62 4954.34,3358 4957.97,3358 4962.36,3353.62 4962.36,3351.22 4974.76,3351.22 4974.76,3353.62 4979.14,3358 4982.77,3358 4987.16,3353.62 4987.16,3349.48 4991.54,3345.1 4995.17,3345.1 4999.56,3349.48 4999.56,3353.62 5003.94,3358 5007.57,3358 5011.96,3353.62 5011.96,3349.48 5016.34,3345.1 5019.97,3345.1 5024.36,3349.48 5024.36,3353.62 5028.74,3358 5032.37,3358 5036.76,3353.62 5036.76,3349.48 5041.14,3345.1 5044.77,3345.1 5057.67,3358 5500.63,3358 5508.32,3365.69 5523.18,3365.69 5532.87,3356 5748,3356 5770,3378 v1(5770,3394)
ETH_TXN: R55.1 U15.99 | length 2776.3
  Top Layer w6.2: R55.1@3913.49,3456.91 v1(3913.49,3498) ; U15.99@5496.67,3664.97 5523.71,3692 5820,3692 5842,3670 5842,3552.4 5846.5,3547.9 5846.5,3544.27 5842.12,3539.88 5840.47,3539.88 5836.09,3535.5 5836.09,3531.87 5840.47,3527.48 5842.12,3527.48 5846.5,3523.1 5846.5,3519.47 5842.12,3515.08 5840.47,3515.08 5836.09,3510.7 5836.09,3507.07 5840.47,3502.68 5842.12,3502.68 5846.5,3498.3 5846.5,3494.67 5842.12,3490.28 5840.47,3490.28 5836.09,3485.9 5836.09,3482.27 5840.47,3477.88 5842.12,3477.88 5846.5,3473.5 5846.5,3469.87 5842,3465.36 5842,3453.08 5846.5,3448.58 5846.5,3444.95 5842,3440.44 5842,3434 v1(5802,3394)
  IO_PINS w6.2: v1(3913.49,3498) 3935.49,3520 3976,3520 4164,3332 4951.57,3332 4957.77,3338.2 4978.23,3338.2 4984.43,3332 5502.13,3332 5506.32,3327.81 5521.18,3327.81 5525.37,3332 5788,3332 5802,3346 v1(5802,3394)
ETH_TXP: R56.1 U15.100 | length 2770.3
  Top Layer w6.2: R56.1@3963.23,3456.91 v1(3963.23,3498) ; U15.100@5486.93,3674.71 5518.22,3706 5826,3706 5862,3670 5862,3412 v1(5846,3396)
  IO_PINS w6.2: v1(3963.23,3498) 4159.23,3302 4789.25,3302 4793.25,3306 4957.68,3306 4962.57,3301.12 4977.43,3301.12 4982.32,3306 5822,3306 5846,3330 v1(5846,3396)
FSPI_CLK: R8.2 U10.6 | length 726.2
  Top Layer w6.2: U10.6@4387.61,3329.8 4389.41,3328 4424,3328 4438,3314 4438,3230 4464,3204 4758,3204 R8.2@4937.95,3383.95
FSPI_CS0N: U10.1 U15.47 | length 766.7
  Top Layer w6.2: U10.1@4694.69,3229.8 4733.8,3229.8 4743.94,3239.94 4750.14,3239.94 4760.44,3229.65 4766.64,3229.65 4769.21,3232.22 4769.21,3238.42 4723.46,3284.17 4723.46,3290.37 4726.03,3292.94 4732.23,3292.94 4777.97,3247.19 4784.17,3247.19 4786.74,3249.76 4786.74,3255.96 4740.98,3301.71 4740.98,3307.91 4743.55,3310.48 4749.75,3310.48 4795.51,3264.72 4802.72,3264.72 4848.72,3310.72 4848.72,3317.94 4823.65,3343.02 4823.65,3349.22 4826.21,3351.78 4832.41,3351.78 4841,3343.2 4847.2,3343.2 4946,3442 4981.41,3442 U15.47@5013.26,3473.86
FSPI_D0: TP2.1 U10.5 U15.41 | length 810.4
  Top Layer w6.2: U10.5@4387.61,3379.8 4413.59,3405.78 4426.23,3405.78 4462.45,3442 4618.61,3442 4623,3437.62 4623,3428.38 4627.38,3424 4631.01,3424 4635.4,3428.38 4635.4,3455.62 4639.78,3460 4643.41,3460 4647.8,3455.62 4647.8,3428.38 4652.18,3424 4655.81,3424 4660.2,3428.38 4660.2,3455.62 4664.58,3460 4668.21,3460 4672.6,3455.62 4672.6,3428.38 4676.98,3424 4680.61,3424 4685,3428.38 4685,3455.59 4689.38,3459.98 4693.01,3459.98 4697.4,3455.59 4697.4,3446.38 4701.78,3442 4853.55,3442 4873.22,3461.67 4879.11,3461.67 4911.44,3494 4916.48,3494 U15.41@4954.8,3532.32
FSPI_D1: U10.2 U15.42 | length 825.8
  Top Layer w6.2: U10.2@4694.69,3279.8 4672.89,3258 4656,3258 4634,3280 4634,3294.85 4638.38,3299.23 4665.62,3299.23 4670,3303.62 4670,3307.25 4665.62,3311.63 4623.36,3311.63 4618.98,3316.02 4618.98,3319.65 4623.36,3324.03 4659.42,3324.03 4663.8,3328.42 4663.8,3332.05 4659.42,3336.43 4623.36,3336.43 4618.98,3340.82 4618.98,3344.45 4623.36,3348.83 4665.62,3348.83 4670,3353.22 4670,3356.85 4665.62,3361.23 4625.3,3361.23 4620.92,3365.62 4620.92,3369.25 4625.3,3373.63 4629.62,3373.63 4634,3378.02 4634,3386 4661.78,3413.78 4839.78,3413.78 4877.45,3451.45 4883.34,3451.45 4913.88,3482 4923.97,3482 U15.42@4964.54,3522.58
FSPI_D2: R37.1 U10.3 U15.44 | length 926.9
  Top Layer w6.2: R37.1@4759.28,3330.2 4695.08,3330.2 U10.3@4694.69,3329.8 4694.69,3335.46 4735.23,3376 4750.08,3376 4754.46,3371.62 4754.46,3360.38 4758.85,3356 4762.48,3356 4766.86,3360.38 4766.86,3391.62 4771.25,3396 4774.88,3396 4779.26,3391.62 4779.26,3360.38 4783.65,3356 4787.28,3356 4791.66,3360.38 4791.66,3391.62 4796.05,3396 4799.68,3396 4804.06,3391.62 4804.06,3360.38 4808.45,3356 4812.08,3356 4816.46,3360.38 4816.46,3391.62 4820.85,3396 4824.48,3396 4828.86,3391.62 4828.86,3368.2 4833.25,3363.82 4836.88,3363.82 4841.26,3368.2 4841.26,3391.62 4845.65,3396 4849.28,3396 4853.66,3391.62 4853.66,3380.38 4858.05,3376 4863.88,3376 4940.1,3452.22 4964.11,3452.22 v1(4971.84,3459.94) ; U15.44@4984.03,3503.09 5008.94,3528 5050,3528 5090,3488 v1(5090,3476.07)
  Bottom Layer w6.2: v1(4971.84,3459.94) 5073.88,3459.94 v1(5090,3476.07)
FSPI_D3: R38.1 U10.7 U15.39 | length 836.5
  Top Layer w6.2: U10.7@4387.41,3280 4356,3311.41 4356,3398 4374,3416 4422,3416 4490,3484 4810.68,3484 4816.68,3490 4873.5,3490 U15.39@4935.31,3551.81
  Top Layer w6.5: R38.1@4325.22,3280 U10.7@4387.41,3280
  Top Layer w7: U10.7@4387.41,3280 U10.7@4387.61,3279.8
GND: ?.1 C1.1 C2.2 C3.1 C4.1 C6.1 C7.1 C8.1 C9.1 C10.2 C11.1 C12.1 C13.2 C14.1 C15.1 C16.1 C17.1 C21.1 C22.1 C23.1 C24.1 C25.2 C28.1 C29.1 C30.1 C31.1 C32.1 C33.1 C34.1 C35.1 C36.1 C37.2 C38.2 C39.1 C41.2 C43.2 C45.2 C46.1 C47.1 C48.1 C49.1 C50.2 C51.1 C53.1 C54.2 C56.1 C57.1 C58.1 C62.1 C63.1 C64.1 C65.1 C75.1 C76.1 CARD1.6 CARD1.10 CARD1.11 CARD1.12 CARD1.13 CN1.7 CN1.8 D1.1 FPC1.5 FPC1.12 FPC1.19 FPC1.20 FPC1.27 FPC1.28 FPC1.35 FPC1.36 FPC1.38 FPC1.41 FPC1.42 FPC2.4 FPC2.7 FPC2.8 FPC3.1 FPC3.3 FPC3.6 FPC3.9 FPC3.12 FPC3.15 FPC3.17 FPC3.18 FPC3.21 FPC3.22 FPC4.1 FPC4.5 FPC4.6 R5.1 R7.1 R14.1 R16.1 R18.1 R21.1 R28.1 R29.2 R30.2 R36.1 R44.1 R45.1 R46.1 SW1.1 SW1.2 SW2.1 SW2.2 SW5.4 U1.21 U5.2 U6.5 U6.10 U7.2 U8.1 U8.4 U8.14 U10.4 U10.9 U11.2 U15.37 U15.57 U15.129 USB1.1 USB1.12 USB1.13 USB1.14 X1.2 X1.4 | length 1392.1
  Top Layer w5: FPC1.12@6035.79,3795.27 6001.27,3795.27 5996,3790 5978,3790 5970,3798 5970,3922 5981.07,3933.07 FPC1.5@6035.79,3933.07
  Top Layer w6.2: CN1.8@4155.32,3225.31 v1(4292,3225.31) ; C62.1@4266.07,3401.73 4310.48,3401.73 C63.1@4322.56,3413.81 4334.64,3413.81 v1(4338.77,3417.94) ; v1(4448,3368) 4477.95,3368 U10.9@4541.15,3304.8 ; v1(4690,3362) 4694.69,3366.69 U10.4@4694.69,3379.8 ; v1@4900,3540 4902.87,3542.87 v1(4902.87,3544.74) 4904.5,3546.38 4904.5,3558.78 4915.83,3570.1 U15.37@4915.83,3571.29 ; R5.1@4965.95,3353.95 4992.83,3327.08 C14.1@4992.83,3326.83 4985.06,3319.06 v1(4970,3319.06) ; v1(6330,3656) 6341.97,3644.03 R16.1@6341.97,3567.06
  Top Layer w7: C12.1@5054.58,3267.08 5056.93,3269.43 5095.43,3269.43 5114,3288 5114,3328 5098.97,3343.03 5098.97,3364.07 5110.7,3375.8 U15.57@5110.7,3376.42
  Top Layer w10: C2.2@5469.46,3268 5469.46,3246.54 v1(5470,3246) ; C34.1@5469.46,3316 5492,3316 5494.39,3318.39 5494.39,3320.72 5500.82,3327.16 5500.82,3332.82 v1(5515.75,3347.75) ; v1(5998.66,3659.94) 6001.12,3657.47 FPC1.19@6035.79,3657.47
  Bottom Layer w5: v1(5160,3726) 5173.46,3739.46 C33.1@5173.46,3760
  Bottom Layer w10: v1(5752,3512) 5784,3512 5908.44,3636.44 C64.1@5944,3636.44
  other v1: 5200,3156.81 5626,3186 5652,3186 3324,3190 3350,3190 5718,3190 5744,3190 3526,3194 3552,3194 3840,3198 3866,3198 3998,3198 4024,3198 6402,3206 5626,3214 5652,3214 3324,3218 3350,3218 5718,3218 5744,3218 3526,3222 3552,3222 3840,3226 3866,3226 3998,3226 4024,3226 5326.97,3246.97 5008,3276 6682,3276 6708,3276 6466,3282 6492,3282 6682,3304 6708,3304 6466,3310 6492,3310 6073.97,3326.81 6398.29,3395.12 5982,3400 4877.25,3417.94 6398,3444 3284,3476 3310,3476 6580,3482 6606,3482 6061.16,3490 3284,3504 3310,3504 6580,3510 6606,3510 7024,3530 7050,3530 7024,3558 7050,3558 6818,3628 5280,3646 5190.75,3650.4 6618,3658 7030,3662 7056,3662 5292,3668 5196.5,3673.67 7030,3690 7056,3690 3276,3752 3302,3752 3276,3780 3302,3780 4090,3798 4116,3798 4090,3826 4116,3826 3740,3878 3766,3878 6552,3878 4472,3892 3740,3906 3766,3906 4693.46,3912.17 6423.01,3941.65 6449.01,3941.65 5670,3964 5696,3964 6423.01,3969.65 6449.01,3969.65 5562,3974 5588,3974 5670,3992 5696,3992 3272,3998 5562,4002 5588,4002 3950,4006 3974,4006 4500,4014 4196,4022 3354,4026 4314,4030 3286,4032 3312,4032 3580,4032 3606,4032 3632,4032 3950,4032 3976,4032 4236,4032 4262,4032 3658,4034 4738,4060 4764,4060 4972.8,4061.47 4998.8,4061.47 6250,4068 4738,4088 4764,4088 4972.8,4089.47 4998.8,4089.47
IO4_A0: U15.46
IO4_A1: SW5.1 U15.45 | length 1391.2
  Top Layer w6.2: v1(4094,3632) 4094.14,3632.14 SW5.1@4094.14,3700.7 ; U15.45@4993.77,3493.34 5012.43,3512 5028,3512 5082,3458 5108,3458 v1(5122,3472)
  IO_PINS w6.2: v1(4094,3632) 4094,3568 4222,3440 5090,3440 v1(5122,3472)
IO4_A5: SW4.2 U15.40 | length 1667.2
  Top Layer w6.2: v1(4826,3471.89) 4874.88,3471.89 U15.40@4945.05,3542.06
  IO_PINS w6.2: v1(3640,3922) 3894,3668 4124,3668 4244,3548 4711.33,3548 4787.45,3471.89 v1(4826,3471.89)
  Bottom Layer w6.2: SW4.2@3493.75,3922.95 3639.05,3922.95 v1(3640,3922)
IO4_A7: SW3.2 U15.38 | length 1849
  Top Layer w6.2: SW3.2@3493.75,3332.8 v1(3638,3332.8) ; U15.38@4925.57,3561.54 4952,3587.97 v1(4952,3598)
  IO_PINS w6.2: v1(3638,3332.8) 3638,3348 3940,3650 4112,3650 4283.5,3478.5 4615.5,3478.5 4642,3452 4884,3452 4970,3538 4970,3580 v1(4952,3598)
LCD+: C65.2 FPC1.39 U11.5 U12.1 | length 527.5
  Top Layer w6.2: FPC1.39@6035.79,3263.77 6072.23,3263.77 6086,3250 v1(6086,3232)
  Bottom Layer w6.2: U12.1@6041,3436 6041,3417 6138,3320 6138,3258 6134.27,3254.27 6134.27,3243.51 6128.95,3238.19 6118.19,3238.19 6112,3232 v1(6086,3232)
  Bottom Layer w10: C65.2@5958.54,3531.08 5963.51,3526.11 U11.5@6007.49,3526.11 6026.89,3526.11 6041,3512 U12.1@6041,3436
LCD-: FPC1.40 R44.2 R45.2 U11.3 | length 513.1
  Top Layer w6.2: FPC1.40@6035.79,3244.07 6037.93,3244.07 v1(6070,3212)
  Bottom Layer w6.2: U11.3@6113.79,3488.71 6142.76,3459.74 6173.92,3459.74 R45.2@6231.65,3459.74
  Bottom Layer w10: v1(6070,3212) 6122,3212 6159.98,3249.98 6159.98,3359.81 6190,3389.82 6190,3443.66 6173.92,3459.74 R44.2@6173.07,3460.58
LCD_D0: FPC1.18 U15.84 | length 1385.7
  Top Layer w5: v1(5396,3556) 5399.24,3552.76 5399.24,3523.85 5388.52,3513.13 5388.52,3506.1 5399.24,3495.38 U15.84@5399.24,3493.34 ; FPC1.18@6035.79,3677.17 6041.1,3682.48 6062.93,3682.48 6085.93,3705.49 6085.93,3872 6098.59,3884.66 v1(6132.3,3884.66)
  CONNECTION w5: v1(5396,3556) 5406,3546 5543.25,3546 5558.98,3561.73 5558.98,3607.53 5563.98,3612.53 6051.78,3612.53 6082.98,3643.73 6082.98,3857.55 6093.27,3867.83 6115.47,3867.83 v1(6132.3,3884.66)
LCD_D1: FPC1.17 U15.83 | length 1535.1
  Top Layer w5: v1(5373.5,3574) 5373.5,3521.41 5378.77,3516.14 5378.77,3496.36 5389.5,3485.63 U15.83@5389.5,3483.6 ; FPC1.17@6035.79,3696.87 6041.1,3702.18 6062.93,3702.18 6076.92,3716.17 6076.92,3898.92 6091.24,3913.24 v1(6109.24,3913.24)
  CONNECTION w5: v1(5373.5,3574) 5373.5,3553.98 5390.49,3536.98 5546.98,3536.98 5568,3558 5568,3598.52 5573,3603.52 6055.52,3603.52 6092,3640 6092,3853.82 6097,3858.82 6135.32,3858.82 6152,3875.5 6152,3898 6134.76,3915.24 6111.24,3915.24 v1(6109.24,3913.24)
LCD_D2: FPC1.16 U15.90 | length 1342.4
  Top Layer w5: v1(5430.46,3576.23) 5433.28,3576.23 U15.90@5457.71,3551.81 ; FPC1.16@6035.79,3716.57 6049.69,3716.57 6054.95,3721.83 6062.93,3721.83 6067.9,3726.8 6067.9,3921.9 6084,3938 v1(6106,3938)
  CONNECTION w5: v1(5430.46,3576.23) 5436.46,3570.23 5436.46,3569.54 5450.98,3555.02 5539.52,3555.02 5549.97,3565.47 5549.97,3611.47 5560.05,3621.55 6048.05,3621.55 6073.97,3647.47 6073.97,3861.28 6088.95,3876.27 6088.95,3933 6093.95,3938 v1(6106,3938)
LCD_D3: FPC1.15 U15.91 | length 780.4
  Top Layer w5: v1(5412.28,3602.28) 5426.71,3602.28 5435.41,3593.57 5437.64,3593.57 5447.8,3583.41 5447.8,3581.18 U15.91@5467.44,3561.54 ; v1(5977.59,3721.45) 5984.55,3728.42 5984.99,3728.42 5992.79,3736.22 FPC1.15@6035.79,3736.22
  CONNECTION w5: v1(5412.28,3602.28) 5415.92,3605.92 5415.92,3627.92 5426.08,3638.08 5439.23,3638.08 5478.26,3677.11 5959.11,3677.11 5977.59,3695.59 v1(5977.59,3721.45)
LCD_D4: FPC1.14 U15.92 | length 779.4
  Top Layer w5: v1(5433.52,3619.62) 5433.52,3614.95 U15.92@5477.19,3571.29 ; v1(5977.8,3745.76) 5987.92,3755.87 FPC1.14@6035.79,3755.87
  CONNECTION w5: v1(5433.52,3619.62) 5482,3668.09 5962.84,3668.09 5998.98,3704.23 5998.98,3724.58 v1(5977.8,3745.76)